# EAGLE board 6-digit-board (EAGLE 6.4)
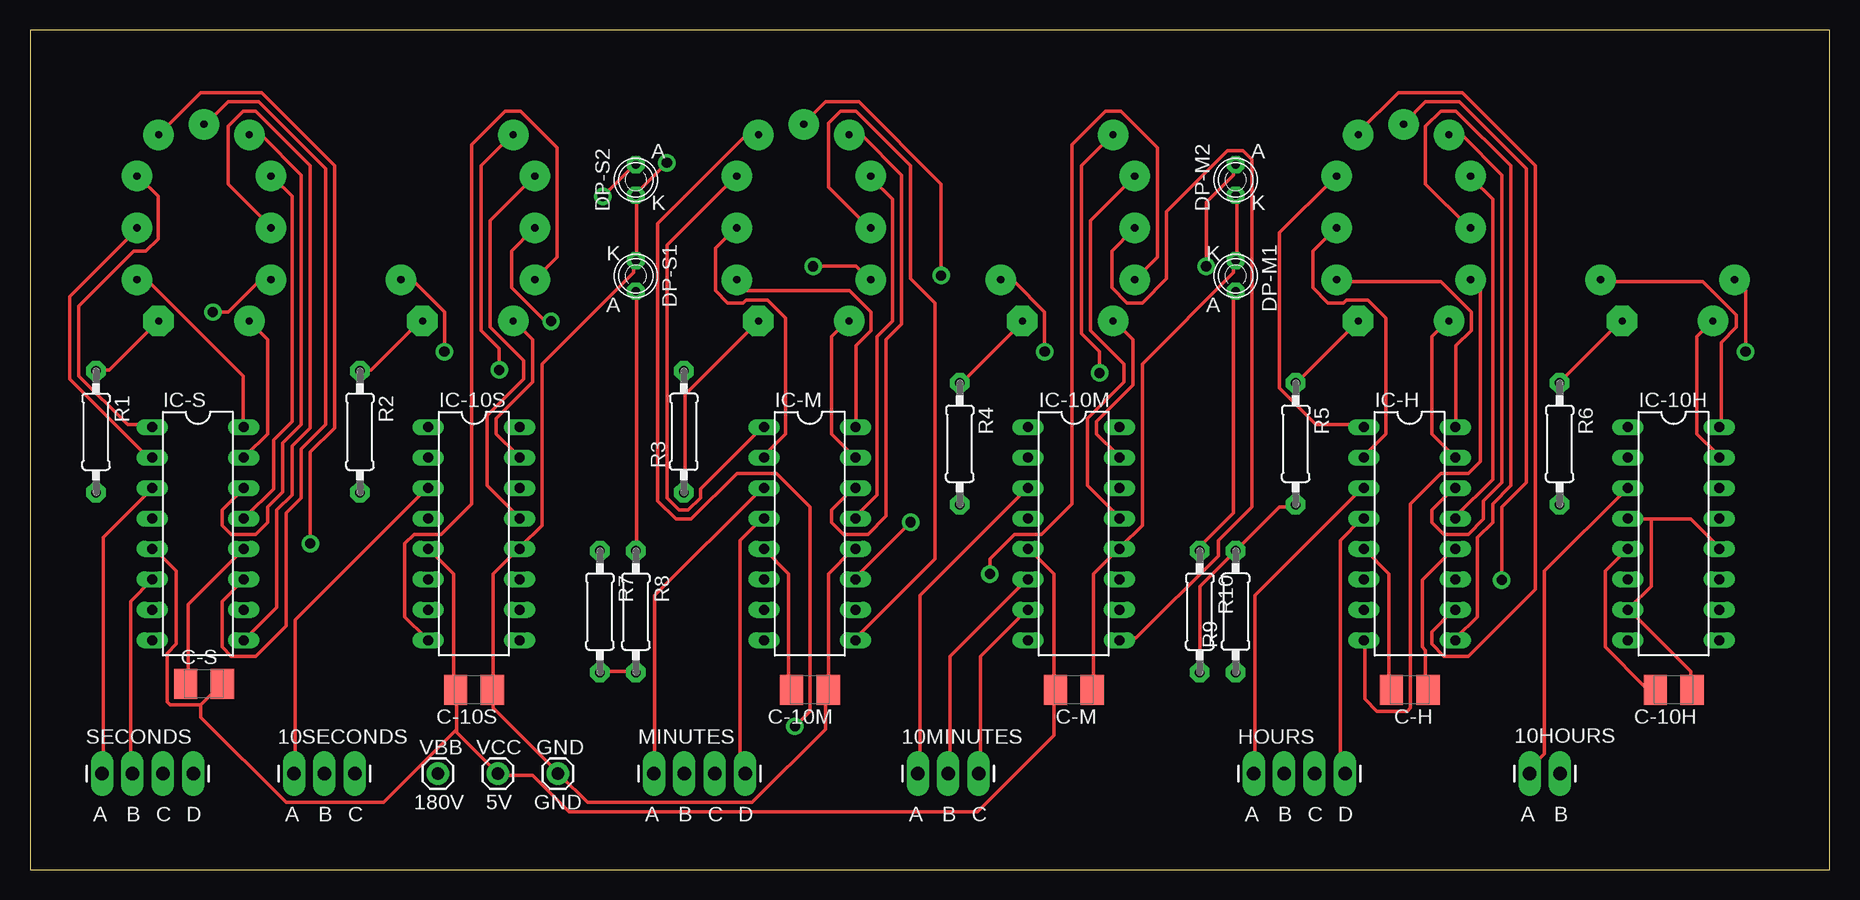
[diagram p0: board, top side]
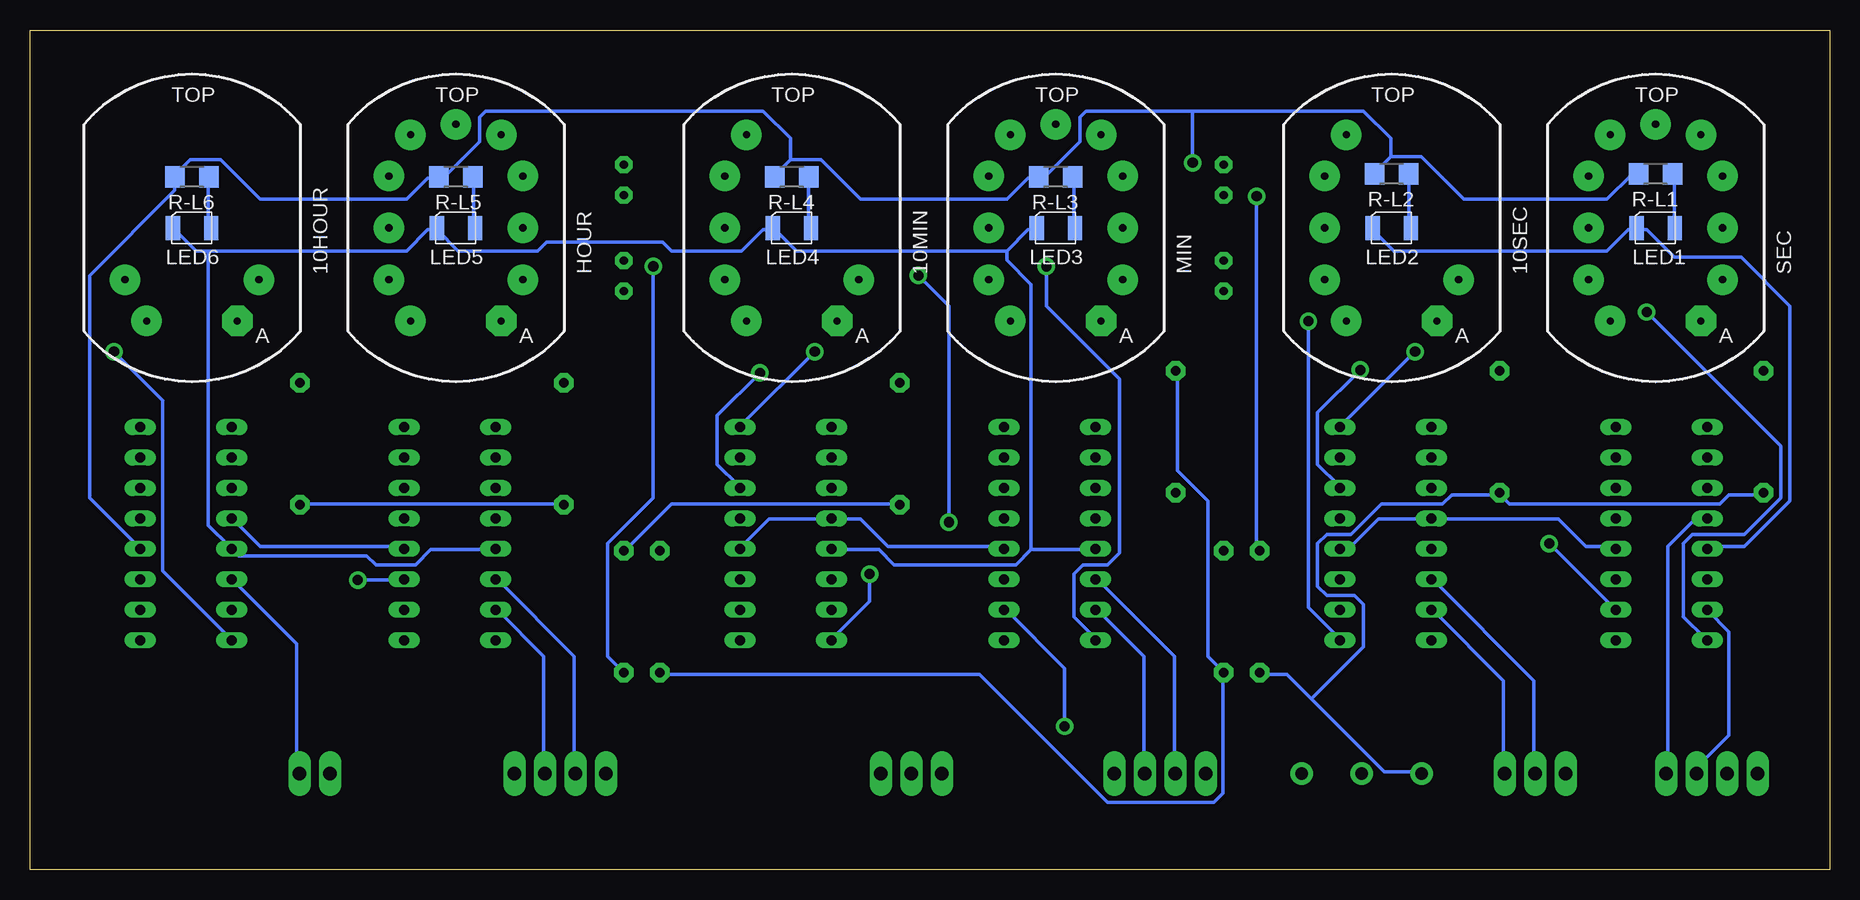
[diagram p1: board, bottom side, seen from below]

Size 150 x 70 mm. Coordinates in mm from the lower left corner, seen from the top.
Outline: 0,0 150,0 150,70 0,70 0,0
Copper layers (1*16): Top 0.035mm / dielectric 1.5mm / Bottom 0.035mm
Design rules "iStivi-0.84mm via": minimum track width 12mil, minimum drill 0.84mm, track to track 12mil, track to pad 12mil, pad to pad 10mil, via to via 1mm, smd to smd 10mil, copper to edge 40mil, drill to drill 8mil, minimum pad ring 10mil, minimum via ring 12mil, stop-mask expansion 0mil, vias tented up to drill 0mil, thermal gap 10mil
bRestrict: area 7.5,56.2 to 10.5,59.2; area 7.5,52 to 10.5,55; area 7.5,47.8 to 10.5,50.8; area 9.2,44.2 to 12.2,47.2; area 16.8,44.2 to 19.8,47.2; area 18.6,47.6 to 21.6,50.6; area 18.6,51.9 to 21.6,54.9; area 18.6,56.1 to 21.6,59.1; area 16.8,59.8 to 19.8,62.8; area 9.2,59.8 to 12.2,62.8; area 13,60.5 to 16,63.5; area 29.5,47.8 to 32.5,50.8; 43 more areas
vRestrict: area 10.8,17.4 to 17.8,38.9; area 33.2,17.4 to 40.2,38.9; area 61.5,17.1 to 68.5,38.6; area 83.1,17.2 to 90.1,38.8; area 111.4,17.2 to 118.4,38.8; area 133.6,17.2 to 140.6,38.8

## Footprints (pad centres in the part's own frame; a part is rotated, then mirrored left to right if it is on the bottom)
IN-12_2DIGIT = drill 0.6 pad 2.54: 0 5.59,-4.32; 1 -3.78,-7.766; 2 -5.59,-4.32 | drill 0.6 pad 2.54 octagon: A 3.78,-7.766
1X02_LONGPADS = drill 1.118 pad 1.88 long: 1 0,0; 2 2.54,0
IN-12_6DIGIT = drill 0.6 pad 2.54: 0 5.59,-4.32; 1 -3.78,-7.766; 2 -5.59,-4.32; 3 -5.59,0; 4 -5.59,4.32; 5 -3.78,7.766 | drill 0.6 pad 2.54 octagon: A 3.78,-7.766
1X03_LONGPADS = drill 1.118 pad 1.88 long: 1 0,0; 2 2.54,0; 3 5.08,0
B/3528-21R = smd 1.95 x 2.5: + 1.525,0; - -1.525,0
INS-1 = drill 0.7 pad 1.422 octagon: A 0,1.27; K 0,-1.27
1X01 = drill 1.016 pad 1.88: 1 0,0
IN-12_NO-DP = drill 0.6 pad 2.54: 0 5.59,-4.32; 1 -3.78,-7.766; 2 -5.59,-4.32; 3 -5.59,0; 4 -5.59,4.32; 5 -3.78,7.766; 6 0,8.64; 7 3.78,7.766; 8 5.59,4.32; 9 5.59,0 | drill 0.6 pad 2.54 octagon: A 3.78,-7.766
1X04_LONGPADS = drill 1.118 pad 1.88 long: 1 0,0; 2 2.54,0; 3 5.08,0; 4 7.62,0
DIL16 = drill 0.813 long: 1 -8.89,-3.81; 2 -6.35,-3.81; 3 -3.81,-3.81; 4 -1.27,-3.81; 5 1.27,-3.81; 6 3.81,-3.81; 7 6.35,-3.81; 8 8.89,-3.81; 9 8.89,3.81; 10 6.35,3.81; 11 3.81,3.81; 12 1.27,3.81; 13 -1.27,3.81; 14 -3.81,3.81; 15 -6.35,3.81; 16 -8.89,3.81
LED1210 = smd 1.2 x 2: A -1.6,0; C 1.6,0
0207/10 = drill 0.8 pad 1.6 octagon: 1 -5.08,0; 2 5.08,0
R1206 = smd 1.6 x 1.803: 1 -1.422,0; 2 1.422,0

## Placement (x,y rotation side)
10HOUR  IN-12_2DIGIT  [IN-12_2DIGIT]  136.5,53.5 0 bottom
10HOURS  [1X02_LONGPADS]  125,8 0 top
10MIN  IN-12_6DIGIT  [IN-12_6DIGIT]  86.5,53.5 0 bottom
10MINUTES  [1X03_LONGPADS]  74,8 0 top
10SEC  IN-12_6DIGIT  [IN-12_6DIGIT]  36.5,53.5 0 bottom
10SECONDS  [1X03_LONGPADS]  22,8 0 top
C-10H  10uF  [B/3528-21R]  137,15 180 top
C-10M  10uF  [B/3528-21R]  65,15 180 top
C-10S  10uF  [B/3528-21R]  37,15 180 top
C-H  10uF  [B/3528-21R]  115,15 180 top
C-M  10uF  [B/3528-21R]  87,15 180 top
C-S  10uF  [B/3528-21R]  14.5,15.5 0 top
DP-M1  INS-1  [INS-1]  100.5,49.5 180 top
DP-M2  INS-1  [INS-1]  100.5,57.5 0 top
DP-S1  INS-1  [INS-1]  50.5,49.5 180 top
DP-S2  INS-1  [INS-1]  50.5,57.5 0 top
GND  [1X01]  44,8 0 top
HOUR  IN-12A-NO_DP  [IN-12_NO-DP]  114.5,53.5 0 bottom
HOURS  [1X04_LONGPADS]  102,8 0 top
IC-10H  74141N  [DIL16]  137,28 270 top
IC-10M  74141N  [DIL16]  87,28 270 top
IC-10S  74141N  [DIL16]  37,28 270 top
IC-H  74141N  [DIL16]  115,28 270 top
IC-M  74141N  [DIL16]  65,28 270 top
IC-S  74141N  [DIL16]  14,28 270 top
LED1  [LED1210]  14.5,53.5 180 bottom
LED2  [LED1210]  36.5,53.5 180 bottom
LED3  [LED1210]  64.5,53.5 180 bottom
LED4  [LED1210]  86.5,53.5 180 bottom
LED5  [LED1210]  114.5,53.5 180 bottom
LED6  [LED1210]  136.5,53.5 180 bottom
MIN  IN-12A-NO_DP  [IN-12_NO-DP]  64.5,53.5 0 bottom
MINUTES  [1X04_LONGPADS]  52,8 0 top
R1  22K  [0207/10]  5.5,36.5 270 top
R2  22K  [0207/10]  27.5,36.5 270 top
R3  22K  [0207/10]  54.5,36.5 90 top
R4  22K  [0207/10]  77.5,35.5 270 top
R5  22K  [0207/10]  105.5,35.5 270 top
R6  22K  [0207/10]  127.5,35.5 270 top
R7  62K  [0207/10]  47.5,21.5 270 top
R8  62K  [0207/10]  50.5,21.5 270 top
R9  62K  [0207/10]  100.5,21.5 90 top
R10  62K  [0207/10]  97.5,21.5 270 top
R-L1  [R1206]  14.5,58 0 bottom
R-L2  [R1206]  36.5,58 0 bottom
R-L3  [R1206]  64.5,57.75 0 bottom
R-L4  [R1206]  86.5,57.75 0 bottom
R-L5  [R1206]  114.5,57.75 0 bottom
R-L6  [R1206]  136.5,57.75 0 bottom
SEC  IN-12A-NO_DP  [IN-12_NO-DP]  14.5,53.5 0 bottom
SECONDS  [1X04_LONGPADS]  6,8 0 top
VBB  [1X01]  34,8 0 top
VCC  [1X01]  39,8 0 top

## Library data of the parts
10HOUR 10MIN 10SEC DP-M1 DP-M2 DP-S1 DP-S2 HOUR MIN SEC = iStivi - Tubes
10HOURS 10MINUTES 10SECONDS GND HOURS MINUTES SECONDS VBB VCC = iStivi - Header-Connector
C-10H C-10M C-10S C-H C-M C-S R1-R10 R-L1-R-L6 = iStivi - RCLD
IC-10H IC-10M IC-10S IC-H IC-M IC-S = iStivi - ICs
LED1-LED6 = iStivi - LED

## Nets
GND: C-10H.- C-10M.- C-10S.- C-H.- C-M.- C-S.- DP-M1.K DP-M2.K DP-S1.K DP-S2.K GND.1 IC-10H.4 IC-10H.7 IC-10H.12 IC-10M.4 IC-10M.12 IC-10S.4 IC-10S.12 IC-H.12 IC-M.12 IC-S.12 R-L1.1 R-L2.1 R-L3.1 R-L4.1 R-L5.1 R-L6.1
N$1: 10HOUR.A R6.1
N$2: HOUR.A R5.1
N$3: 10MIN.A R4.1
N$4: MIN.A R3.1
N$5: 10SEC.A R2.1
N$6: R1.1 SEC.A
N$7: HOURS.1 IC-H.3
N$8: HOURS.2 IC-H.6
N$9: DP-M1.A R10.1
N$10: DP-M2.A R9.1
N$11: DP-S1.A R8.1
N$12: DP-S2.A R7.1
N$13: HOUR.0 IC-H.16
N$14: HOUR.1 IC-H.15
N$15: HOUR.2 IC-H.8
N$16: HOUR.3 IC-H.9
N$17: HOUR.4 IC-H.13
N$18: HOUR.5 IC-H.14
N$19: HOUR.6 IC-H.11
N$20: HOUR.7 IC-H.10
N$21: HOUR.8 IC-H.1
N$22: HOUR.9 IC-H.2
N$23: 10HOUR.1 IC-10H.15
N$24: 10HOUR.0 IC-10H.16
N$25: 10HOUR.2 IC-10H.8
N$26: 10MIN.0 IC-10M.16
N$27: 10MIN.1 IC-10M.15
N$28: 10MIN.2 IC-10M.8
N$29: 10MIN.3 IC-10M.9
N$30: 10MIN.4 IC-10M.13
N$31: 10MIN.5 IC-10M.14
N$32: IC-M.16 MIN.0
N$33: IC-M.15 MIN.1
N$34: IC-M.8 MIN.2
N$35: IC-M.9 MIN.3
N$36: IC-M.13 MIN.4
N$37: IC-M.14 MIN.5
N$38: IC-M.11 MIN.6
N$39: IC-M.10 MIN.7
N$40: IC-M.1 MIN.8
N$41: IC-M.2 MIN.9
N$42: 10SEC.0 IC-10S.16
N$43: 10SEC.1 IC-10S.15
N$44: 10SEC.2 IC-10S.8
N$45: 10SEC.3 IC-10S.9
N$46: 10SEC.4 IC-10S.13
N$47: 10SEC.5 IC-10S.14
N$48: IC-S.16 SEC.0
N$49: IC-S.15 SEC.1
N$50: IC-S.8 SEC.2
N$51: IC-S.9 SEC.3
N$52: IC-S.13 SEC.4
N$53: IC-S.14 SEC.5
N$54: IC-S.11 SEC.6
N$55: IC-S.10 SEC.7
N$56: IC-S.1 SEC.8
N$57: IC-S.2 SEC.9
N$58: HOURS.3 IC-H.7
N$59: HOURS.4 IC-H.4
N$60: IC-S.3 SECONDS.1
N$61: IC-S.6 SECONDS.2
N$62: IC-S.7 SECONDS.3
N$63: IC-S.4 SECONDS.4
N$64: IC-M.3 MINUTES.1
N$65: IC-M.6 MINUTES.2
N$66: IC-M.7 MINUTES.3
N$67: IC-M.4 MINUTES.4
N$68: 10SECONDS.1 IC-10S.3
N$69: 10SECONDS.2 IC-10S.6
N$70: 10SECONDS.3 IC-10S.7
N$71: 10MINUTES.1 IC-10M.3
N$72: 10MINUTES.2 IC-10M.6
N$73: 10MINUTES.3 IC-10M.7
N$74: 10HOURS.1 IC-10H.3
N$75: 10HOURS.2 IC-10H.6
N$76: LED1.A R-L1.2
N$77: LED2.A R-L2.2
N$78: LED3.A R-L3.2
N$79: LED4.A R-L4.2
N$80: LED5.A R-L5.2
N$81: LED6.A R-L6.2
VBB: R1.2 R2.2 R3.2 R4.2 R5.2 R6.2 R7.2 R8.2 R9.2 R10.2 VBB.1
VCC: C-10H.+ C-10M.+ C-10S.+ C-H.+ C-M.+ C-S.+ IC-10H.5 IC-10M.5 IC-10S.5 IC-H.5 IC-M.5 IC-S.5 LED1.C LED2.C LED3.C LED4.C LED5.C LED6.C VCC.1

## Tracks (layer width: path | path; a pad name or v marks a point on that pad's centre or on a via)
GND  (via drill 0.84)
  Top 0.305: IC-M.12 68.58,26.67 66.55,24.64 66.55,15.24 C-10M.- 66.29,14.99 66.29,11.68 60.2,5.59 46.48,5.59 44.2,7.87 GND.1 43.94,8.13 38.61,13.46 38.61,14.99 C-10S.- 38.61,15.24 38.61,24.64 40.64,26.67 IC-10S.12 40.89,26.92 42.67,28.7 42.67,42.16 50.29,49.78 50.29,50.55 DP-S1.K 50.55,50.8 50.55,56.13 DP-S2.K 50.55,56.39 v53.09,58.93 | DP-M2.K 100.58,56.13 100.58,50.8 DP-M1.K 100.33,50.55 100.33,49.78 92.71,42.16 92.71,28.7 90.93,26.92 IC-10M.12 90.68,26.67 88.65,24.64 88.65,15.24 C-M.- | C-S.- 13.21,15.75 13.21,22.1 17.78,26.67 IC-S.12 | C-H.- 116.33,15.24 116.33,18.29 116.08,18.54 116.08,24.13 118.62,26.67 IC-H.12 | 135.13,29.21 138.43,29.21 140.72,26.92 IC-10H.12 | 135.13,29.21 133.35,29.21 IC-10H.4 | C-10H.- 138.43,15.24 138.43,16.51 133.35,21.59 IC-10H.7 133.35,21.84 135.13,23.62 135.13,29.21
  Bottom 0.305: IC-10M.12 90.68,26.92 88.39,29.21 83.31,29.21 IC-10M.4 83.06,29.21 80.77,29.21 78.49,26.92 68.83,26.92 IC-M.12 | IC-10S.12 40.64,26.92 39.88,26.92 37.59,29.21 33.27,29.21 IC-10S.4 33.02,29.21 22.61,29.21 20.32,26.92 18.03,26.92 IC-S.12 | IC-H.12 118.87,26.92 130.81,26.92 133.1,29.21 IC-10H.4 | IC-10H.12 140.97,26.92 145.03,30.99 145.03,49.53 137.92,56.64 R-L6.1 137.92,57.91 136.65,59.18 134.11,59.18 130.81,55.88 118.62,55.88 116.84,57.66 116.08,57.66 R-L5.1 115.82,57.91 115.32,57.91 112.52,60.71 112.52,62.74 112.01,63.25 88.9,63.25 86.61,60.96 86.61,59.18 | 86.61,59.18 84.07,59.18 80.77,55.88 68.58,55.88 66.8,57.66 66.04,57.66 R-L3.1 65.79,57.91 65.28,57.91 62.48,60.71 62.48,62.74 61.98,63.25 53.09,63.25 | 86.61,59.18 87.88,57.91 R-L4.1 | 36.58,59.44 34.04,59.44 30.48,55.88 18.54,55.88 16.51,57.91 16,57.91 R-L1.1 | 36.58,59.44 37.85,58.17 R-L2.1 | 53.09,63.25 38.86,63.25 36.58,60.96 36.58,59.44 | 53.09,63.25 v53.09,58.93
N$1
  Top 0.305: R6.1 127.51,40.64 132.59,45.72 10HOUR.A
N$2
  Top 0.305: R5.1 105.66,40.64 110.74,45.72 HOUR.A
N$3
  Top 0.305: R4.1 77.72,40.64 82.8,45.72 10MIN.A
N$4
  Top 0.305: MIN.A 54.61,39.62 54.61,31.5 R3.1
N$5
  Top 0.305: R2.1 27.69,41.66 28.45,41.66 32.51,45.72 10SEC.A
N$6
  Top 0.305: R1.1 5.59,41.66 6.6,41.66 10.67,45.72 SEC.A
N$7
  Top 0.305: IC-H.3 111,31.75 102.11,22.86 102.11,8.13 HOURS.1
N$8
  Bottom 0.305: IC-H.6 111,24.13 104.65,17.78 104.65,8.13 HOURS.2
N$9
  Top 0.305: DP-M1.A 100.33,48.01 100.33,29.72 97.28,26.67 R10.1
N$10  (via drill 0.84)
  Top 0.305: v98.04,50.29 98.04,55.63 100.33,57.91 100.33,58.67 DP-M2.A
  Bottom 0.305: v98.04,50.29 98.04,30.99 101.85,27.18 101.85,17.78 100.58,16.51 R9.1
N$11
  Top 0.305: DP-S1.A 50.55,48.01 50.55,26.67 R8.1
N$12  (via drill 0.84)
  Top 0.305: v47.75,56.13 50.29,58.67 DP-S2.A
  Bottom 0.305: v47.75,56.13 47.75,26.67 R7.1
N$13
  Top 0.305: IC-H.16 118.87,37.08 118.87,43.69 120.14,44.96 120.14,46.48 117.6,49.02 108.97,49.02 HOUR.0
N$14
  Top 0.305: IC-H.15 118.62,34.54 116.84,36.32 116.84,44.45 118.11,45.72 HOUR.1
N$15
  Top 0.305: IC-H.8 111.25,19.05 111.25,14.22 112.27,13.21 114.81,13.21 115.06,13.46 115.06,30.48 117.6,33.02 119.89,33.02 120.9,34.04 120.9,48.26 120.14,49.02 HOUR.2
N$16
  Top 0.305: IC-H.9 118.87,19.3 120.65,21.08 120.65,27.69 121.92,28.96 121.92,30.48 123.44,32 123.44,58.67 118.87,63.25 117.6,63.25 116.33,61.98 116.33,57.15 119.89,53.59 HOUR.3
N$17
  Top 0.305: IC-H.13 118.87,29.46 121.92,32.51 121.92,55.88 120.14,57.66 HOUR.4
N$18
  Top 0.305: IC-H.14 118.62,31.75 116.84,29.97 116.84,28.96 117.86,27.94 119.89,27.94 121.16,29.21 121.16,30.73 122.68,32.26 122.68,57.91 119.38,61.21 118.36,61.21 HOUR.5
N$19  (via drill 0.84)
  Top 0.305: v122.68,24.13 122.68,30.23 124.71,32.26 124.71,58.42 119.13,64.01 116.33,64.01 114.55,62.23 HOUR.6
  Bottom 0.305: v122.68,24.13 118.87,24.13 IC-H.11
N$20
  Top 0.305: IC-H.10 118.62,21.59 116.84,19.81 116.84,18.8 117.86,17.78 119.89,17.78 125.48,23.37 125.48,58.67 119.38,64.77 114.05,64.77 110.74,61.47 HOUR.7
N$21
  Top 0.305: IC-H.1 111,37.08 107.19,37.08 104.14,40.13 104.14,53.09 108.71,57.66 HOUR.8
N$22
  Top 0.305: IC-H.2 111.25,34.54 113.03,36.32 113.03,45.97 111.51,47.5 109.73,47.5 109.47,47.24 108.2,47.24 106.93,48.51 106.93,51.56 108.71,53.34 HOUR.9
N$23
  Top 0.305: IC-10H.15 140.72,34.54 138.94,36.32 138.94,44.45 140.21,45.72 10HOUR.1
N$24
  Top 0.305: IC-10H.16 140.97,37.08 140.97,43.94 142.24,45.21 142.24,46.23 139.45,49.02 131.06,49.02 10HOUR.0
N$25  (via drill 0.84)
  Top 0.305: v143,43.18 143,48.26 142.24,49.02 10HOUR.2
  Bottom 0.305: v143,43.18 138.94,39.12 138.94,24.89 133.35,19.3 IC-10H.8
N$26  (via drill 0.84)
  Top 0.305: v84.58,43.18 84.58,46.48 82.04,49.02 81.03,49.02 10MIN.0
  Bottom 0.305: v84.58,43.18 90.68,37.08 IC-10M.16
N$27
  Top 0.305: IC-10M.15 90.68,34.54 88.9,36.32 88.9,37.34 91.95,40.39 91.95,44.2 90.42,45.72 10MIN.1
N$28  (via drill 0.84)
  Top 0.305: v80.01,24.64 80.01,25.91 82.04,27.94 84.33,27.94 86.87,30.48 86.87,60.45 89.66,63.25 90.93,63.25 93.98,60.2 93.98,51.05 92.2,49.28 10MIN.2
  Bottom 0.305: v80.01,24.64 80.01,22.35 83.06,19.3 IC-10M.8
N$29
  Top 0.305: IC-10M.9 90.93,19.3 92.2,19.3 99.06,26.16 99.06,27.43 101.85,30.23 101.85,59.18 101.09,59.94 99.82,59.94 94.74,54.86 94.74,49.28 92.71,47.24 91.44,47.24 90.17,48.51 90.17,51.56 91.95,53.34 10MIN.3
N$30
  Top 0.305: IC-10M.13 90.68,29.46 88.14,32 88.14,37.59 91.19,40.64 91.19,42.16 88.39,44.96 88.39,54.1 91.95,57.66 10MIN.4
N$31  (via drill 0.84)
  Top 0.305: v89.15,41.4 89.15,43.18 87.63,44.7 87.63,58.67 90.17,61.21 10MIN.5
  Bottom 0.305: v89.15,41.4 92.71,37.85 92.71,33.78 90.93,32 IC-10M.14
N$32
  Top 0.305: IC-M.16 68.83,37.08 68.83,43.69 70.1,44.96 70.1,46.48 68.33,48.26 59.69,48.26 58.93,49.02 MIN.0
N$33
  Top 0.305: IC-M.15 68.58,34.54 66.8,36.32 66.8,44.45 68.07,45.72 MIN.1
N$34  (via drill 0.84)
  Top 0.305: v65.28,50.29 68.83,50.29 69.85,49.28 MIN.2
  Bottom 0.305: v65.28,50.29 65.28,46.99 59.18,40.89 59.18,26.42 60.2,25.4 62.23,25.4 62.99,24.64 62.99,21.08 61.21,19.3 IC-M.8
N$35
  Top 0.305: IC-M.9 68.83,19.3 75.44,25.91 75.44,47.24 73.41,49.28 73.41,58.67 68.83,63.25 67.56,63.25 66.55,62.23 66.55,56.9 69.85,53.59 MIN.3
N$36
  Top 0.305: IC-M.13 68.83,29.46 70.61,31.24 70.61,44.45 71.88,45.72 71.88,55.88 70.1,57.66 MIN.4
N$37
  Top 0.305: IC-M.14 68.58,31.75 66.8,29.97 66.8,28.96 67.82,27.94 69.85,27.94 71.37,29.46 71.37,44.2 72.64,45.47 72.64,57.91 69.34,61.21 68.33,61.21 MIN.5
N$38  (via drill 0.84)
  Top 0.305: v73.41,28.96 68.83,24.38 IC-M.11 | v75.95,49.53 75.95,57.15 69.09,64.01 66.29,64.01 64.52,62.23 MIN.6
  Bottom 0.305: v73.41,28.96 73.41,46.99 v75.95,49.53
N$39  (via drill 0.84)
  Top 0.305: v63.75,11.94 65.02,13.21 65.02,30.23 62.23,33.02 58.93,33.02 55.12,29.21 53.85,29.21 52.32,30.73 52.32,53.85 59.69,61.21 60.71,61.21 MIN.7
  Bottom 0.305: v63.75,11.94 63.75,16.76 68.58,21.59 IC-M.10
N$40
  Top 0.305: IC-M.1 60.96,36.83 55.88,31.75 55.88,30.99 54.86,29.97 54.1,29.97 53.09,30.99 53.09,52.07 58.67,57.66 MIN.8
N$41
  Top 0.305: IC-M.2 61.21,34.54 62.99,36.32 62.99,45.97 61.47,47.5 59.69,47.5 59.44,47.24 58.17,47.24 57.15,48.26 57.15,51.82 58.67,53.34 MIN.9
N$42  (via drill 0.84)
  Top 0.305: v34.54,43.18 34.54,46.48 32,49.02 30.99,49.02 10SEC.0
  Bottom 0.305: v34.54,43.18 40.64,37.08 IC-10S.16
N$43
  Top 0.305: IC-10S.15 40.64,34.54 38.86,36.32 38.86,37.59 41.91,40.64 41.91,44.2 40.39,45.72 10SEC.1
N$44
  Top 0.305: IC-10S.8 33.02,19.3 31.24,21.08 31.24,27.18 32,27.94 34.29,27.94 36.83,30.48 36.83,60.45 39.62,63.25 40.89,63.25 43.94,60.2 43.94,51.05 42.16,49.28 10SEC.2
N$45  (via drill 0.84)
  Top 0.305: v43.43,45.72 42.93,45.72 40.13,48.51 40.13,51.56 41.91,53.34 10SEC.3
  Bottom 0.305: v43.43,45.72 43.43,21.84 40.89,19.3 IC-10S.9
N$46
  Top 0.305: IC-10S.13 40.64,29.46 38.1,32 38.1,37.85 41.15,40.89 41.15,42.42 38.35,45.21 38.35,54.1 41.91,57.66 10SEC.4
N$47  (via drill 0.84)
  Top 0.305: v39.12,41.66 39.12,43.43 37.59,44.96 37.59,58.67 40.13,61.21 10SEC.5
  Bottom 0.305: v39.12,41.66 42.67,38.1 42.67,33.78 40.89,32 IC-10S.14
N$48
  Top 0.305: IC-S.16 17.78,37.08 17.78,41.15 9.91,49.02 9.14,49.02 SEC.0
N$49
  Top 0.305: IC-S.15 18.03,34.54 19.81,36.32 19.81,44.2 SEC.1
N$50  (via drill 0.84)
  Top 0.305: v15.24,46.48 16.51,46.48 19.05,49.02 20.07,49.02 SEC.2
  Bottom 0.305: v15.24,46.48 4.06,35.31 4.06,30.99 7.11,27.94 11.43,27.94 12.19,27.18 12.19,21.08 10.41,19.3 IC-S.8
N$51
  Top 0.305: IC-S.9 18.03,19.3 20.57,21.84 20.57,29.97 21.84,31.24 21.84,35.31 23.37,36.83 23.37,58.67 18.8,63.25 17.78,63.25 16.51,61.98 16.51,57.15 20.07,53.59 SEC.3
N$52
  Top 0.305: IC-S.13 18.03,29.46 20.32,31.75 20.32,35.81 21.84,37.34 21.84,56.13 20.32,57.66 SEC.4
N$53
  Top 0.305: IC-S.14 17.78,31.75 16,29.97 16,28.7 16.76,27.94 18.8,27.94 19.81,28.96 19.81,30.23 21.08,31.5 21.08,35.56 22.61,37.08 22.61,57.91 19.3,61.21 18.29,61.21 SEC.5
N$54
  Top 0.305: IC-S.11 17.78,24.13 16,22.35 16,18.54 16.76,17.78 18.8,17.78 21.34,20.32 21.34,29.72 22.61,30.99 22.61,35.05 24.64,37.08 24.64,58.42 19.05,64.01 16.51,64.01 14.73,62.23 SEC.6
N$55  (via drill 0.84)
  Top 0.305: v23.37,27.18 23.37,34.8 25.4,36.83 25.4,58.67 19.3,64.77 14.22,64.77 SEC.7
  Bottom 0.305: v23.37,27.18 18.03,21.84 IC-S.10
N$56
  Top 0.305: IC-S.1 10.16,37.08 8.13,37.08 4.06,41.15 4.06,46.99 8.64,51.56 9.65,51.56 10.67,52.58 10.67,56.13 9.14,57.66 SEC.8
N$57
  Top 0.305: IC-S.2 10.16,34.54 9.65,34.54 3.3,40.89 3.3,47.75 8.89,53.34 SEC.9
N$58
  Bottom 0.305: IC-H.7 111,21.59 107.19,17.78 107.19,8.13 HOURS.3
N$59
  Top 0.305: IC-H.4 111,29.21 109.22,27.43 109.22,8.38 109.47,8.13 HOURS.4
N$60
  Top 0.305: IC-S.3 10.16,31.75 6.1,27.69 6.1,8.13 SECONDS.1
N$61
  Top 0.305: IC-S.6 10.16,24.13 8.38,22.35 8.38,8.13 SECONDS.2
N$62
  Bottom 0.305: IC-S.7 10.16,21.59 8.38,19.81 8.38,11.18 10.92,8.64 10.92,8.13 SECONDS.3
N$63
  Bottom 0.305: IC-S.4 10.41,29.21 11.18,29.21 13.46,26.92 13.46,8.13 SECONDS.4
N$64
  Top 0.305: IC-M.3 60.96,31.75 52.07,22.86 52.07,8.13 MINUTES.1
N$65
  Bottom 0.305: IC-M.6 60.96,24.13 54.61,17.78 54.61,8.13 MINUTES.2
N$66
  Bottom 0.305: IC-M.7 60.96,21.59 57.15,17.78 57.15,8.13 MINUTES.3
N$67
  Top 0.305: IC-M.4 60.96,29.21 59.18,27.43 59.18,8.38 59.44,8.13 MINUTES.4
N$68
  Top 0.305: IC-10S.3 33.02,31.75 22.1,20.83 22.1,8.13 10SECONDS.1
N$69
  Bottom 0.305: IC-10S.6 33.02,24.13 24.64,15.75 24.64,8.13 10SECONDS.2
N$70
  Bottom 0.305: IC-10S.7 33.02,21.59 27.18,15.75 27.18,8.13 10SECONDS.3
N$71
  Top 0.305: IC-10M.3 83.06,31.75 74.17,22.86 74.17,8.13 10MINUTES.1
N$72
  Top 0.305: IC-10M.6 83.06,24.13 76.71,17.78 76.71,8.13 10MINUTES.2
N$73
  Top 0.305: IC-10M.7 83.06,21.59 79.25,17.78 79.25,8.13 10MINUTES.3
N$74
  Top 0.305: IC-10H.3 133.1,31.75 126.24,24.89 126.24,9.65 125.22,8.64 125.22,8.13 10HOURS.1
N$75
  Bottom 0.305: IC-10H.6 133.1,24.13 127.76,18.8 127.76,8.13 10HOURS.2
N$76
  Bottom 0.305: R-L1.2 12.95,57.91 12.95,53.59 LED1.A
N$77
  Bottom 0.305: R-L2.2 35.05,57.91 35.05,53.59 LED2.A
N$78
  Bottom 0.305: R-L3.2 62.99,57.66 62.99,53.59 LED3.A
N$79
  Bottom 0.305: R-L4.2 85.09,57.66 85.09,53.59 LED4.A
N$80
  Bottom 0.305: R-L5.2 113.03,57.66 113.03,53.59 LED5.A
N$81
  Bottom 0.305: R-L6.2 135.13,57.66 135.13,53.59 LED6.A
VBB
  Top 0.305: R10.2 97.54,16.51 97.54,23.62 100.33,26.42 R9.2 100.58,26.67 104.14,30.23 105.41,30.23 R5.2 | R7.2 47.75,16.51 50.29,16.51 R8.2
  Bottom 0.305: R4.2 77.72,30.48 96.52,30.48 100.33,26.67 R9.2 | R6.2 127.25,30.48 105.66,30.48 R5.2 | R1.2 5.59,31.24 8.38,31.24 9.14,30.48 26.67,30.48 27.43,31.24 R2.2 27.69,31.24 31.5,31.24 32.26,30.48 37.34,30.48 39.88,27.94 41.91,27.94 42.67,27.18 42.67,23.62 41.91,22.86 39.62,22.86 38.86,22.1 38.86,18.54 43.18,14.22 | R3.2 54.36,41.4 54.36,33.27 51.82,30.73 51.82,17.78 50.55,16.51 R8.2 50.55,16.26 50.55,6.35 51.31,5.59 60.2,5.59 70.87,16.26 97.28,16.26 R10.2 | 43.18,14.22 45.21,16.26 47.5,16.26 R7.2 | 43.18,14.22 37.08,8.13 34.04,8.13 VBB.1
VCC
  Top 0.305: 14.22,13.72 16,15.49 C-S.+ | 14.22,13.72 11.68,13.72 11.43,13.97 11.43,18.03 12.19,18.8 12.19,24.89 10.41,26.67 IC-S.5 | 35.56,11.68 35.56,11.43 38.86,8.13 VCC.1 39.12,7.87 41.91,7.87 44.96,4.83 78.99,4.83 85.34,11.18 85.34,14.99 C-M.+ 85.34,15.24 85.34,24.64 83.31,26.67 IC-10M.5 | 35.56,11.68 35.56,14.99 C-10S.+ 35.31,15.24 35.31,24.64 33.27,26.67 IC-10S.5 | 14.22,13.72 14.22,12.7 21.34,5.59 29.46,5.59 35.56,11.68 | C-10M.+ 63.25,15.24 63.25,24.64 61.21,26.67 IC-M.5 | C-H.+ 113.28,15.24 113.28,24.64 111.25,26.67 IC-H.5 | C-10H.+ 135.38,15.24 134.62,15.24 131.32,18.54 131.32,24.89 133.1,26.67 IC-10H.5
  Bottom 0.305: LED2.C 38.1,53.34 36.32,51.56 18.54,51.56 16.76,53.34 16.26,53.34 LED1.C 16,53.34 15.24,53.34 12.95,51.05 7.37,51.05 3.3,46.99 3.3,30.73 7.11,26.92 10.16,26.92 IC-S.5 | 68.58,51.56 66.8,53.34 66.29,53.34 LED3.C | 68.58,51.56 86.11,51.56 87.88,53.34 LED4.C 88.14,53.34 88.9,53.34 90.68,51.56 96.52,51.56 97.28,52.32 106.93,52.32 107.7,51.56 114.3,51.56 116.08,53.34 LED5.C 116.33,53.34 116.84,53.34 118.62,51.56 135.13,51.56 | 66.55,26.67 61.21,26.67 IC-M.5 | 66.55,26.67 67.82,25.4 77.98,25.4 79.25,26.67 83.06,26.67 IC-10M.5 | 68.58,51.56 68.58,50.8 66.55,48.77 66.55,26.67 | 135.13,51.56 136.14,51.56 137.92,53.34 LED6.C | IC-H.5 111.25,26.67 116.59,26.67 117.86,25.4 121.16,25.4 121.92,26.16 132.59,26.16 133.1,26.67 IC-10H.5 133.35,26.92 135.13,28.7 135.13,51.56

## Text on the board
tNames: 180V | 5V | GND | A | B | C | D | A | B | C | A | B | C | D | A | B | C | A | B | C | D | A | B